# Altium PCB MCU_board_2024-08-19.pcbdoc
Units mil, origin at the board's own origin, x right, y up, seen from the top; angles counter-clockwise.
Board outline 1649.61 x 1629.92 mil, 2 copper layers (Top Layer, Bottom Layer); 11 components, 44 nets, 73 pads, 20 vias.
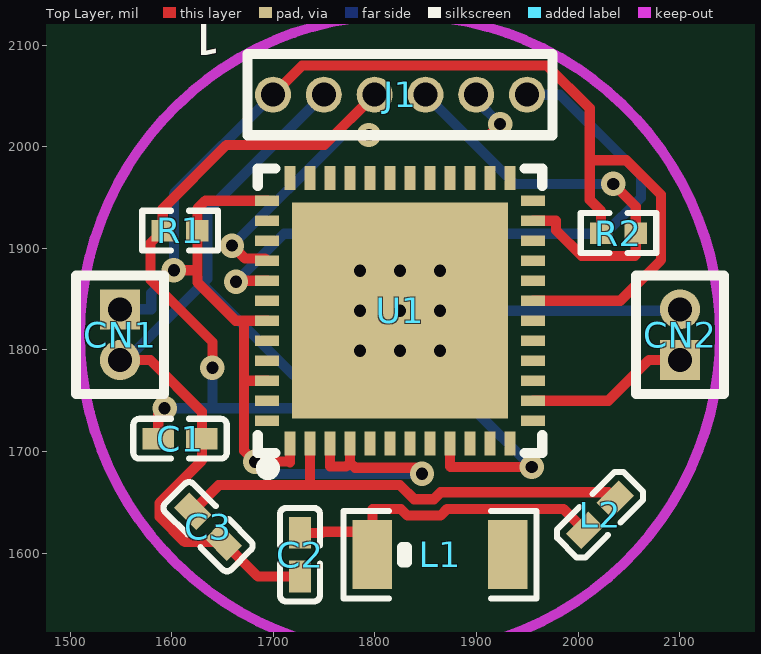
[diagram p0: Top Layer view]
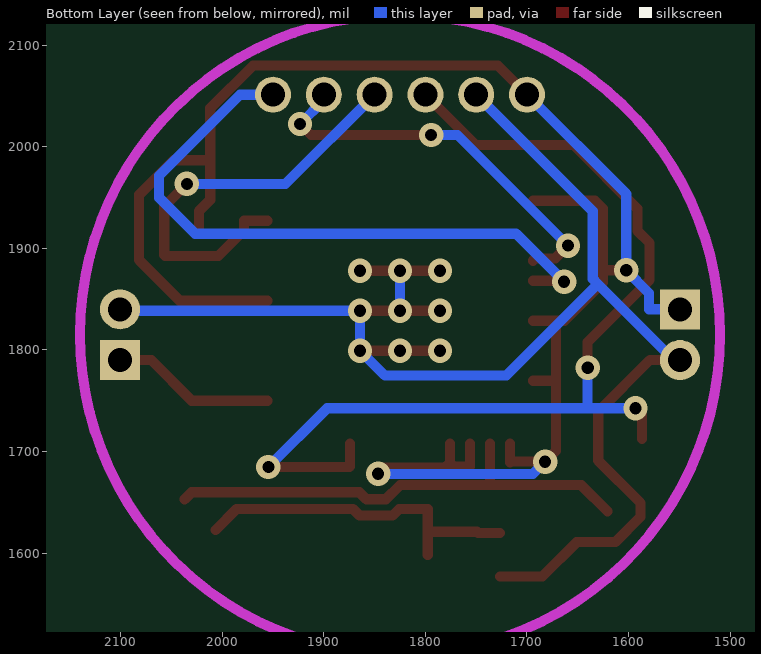
[diagram p1: Bottom Layer view, seen from below]

## Layer stack, top to bottom
Top Layer: signal copper (thickness not stored)
Dielectric: dielectric 12.6, FR-4, Dk 4.8
Bottom Layer: signal copper (thickness not stored)

## Board outline
2649.61,1000 1000,1000 1000,2629.92 2649.61,2629.92

## Components (designator, comment, footprint, x,y, rotation, side; value= is the part's Value field where it differs from the comment)
C1 "0.1uF" C0402 1608.27,1712.6 r0 top
C2 "2.7pF" C0402 1726.38,1598.42 r90 top
C3 "4.7pF" C0402 1635.83,1625.98 r135 top
CN1 "KH-1.27FH-1X2P-H4.3" HDR-TH_2P-P1.27-V-F 1549.21,1814.96 r270 top
CN2 "KH-1.27FH-1X2P-H4.3" HDR-TH_2P-P1.27-V-F 2100.39,1814.96 r90 top
J1 "HDR-M-2.54_1x6" CONN-TH_6P-P1.27_KINGHELM_KH-1.27FH-1X6P-H4.3 1824.8,2051.18 r0 top
L1 "ANT SMD L3.1 W1.6" ANT-SMD_L3.1-W1.6 1864.17,1598.42 r0 top
L2 "1.6nH" L0402 2021.65,1637.8 r45 top
R1 "10k" R0402 1608.27,1917.32 r0 top
R2 "10k" R0402 2039.8,1914.96 r0 top
U1 "ESP32-PICO-D4" LGA-48_L7.0-W7.0-P0.50-BL-EP5.4 1824.8,1838.58 r0 top

## Footprints (in the part's own frame and the unit in brackets; to place one, negate y for a bottom-side part, rotate by r counter-clockwise, add the part's x,y. Pads: shape width x height; smd on the part's side, far side on the other; paste and mask are expansions set on the pad)
ANT-SMD_L3.1-W1.6 [mil]
  rect 38.73x68.03 smd: 1(-66.61,0) 2(66.61,0)
  silkscreen extent -95,-43 95,43
C0402 [mm]
  rect 0.79x0.54 smd: 1(-0.545,0) 2(0.545,0)
  silkscreen extent -1.17,-0.5 1.17,0.5
CONN-TH_6P-P1.27_KINGHELM_KH-1.27FH-1X6P-H4.3 [mm]
  round 0.9 hole 0.6: 1(-3.175,0) 2(-1.905,0) 3(-0.635,0) 4(0.635,0) 5(1.905,0) 6(3.175,0)
  silkscreen extent -3.81,-1.02 3.81,1.02
HDR-TH_2P-P1.27-V-F [mm]
  rect 1x1 hole 0.6: 1(-0.635,0)
  round 1 hole 0.6: 2(0.635,0)
  silkscreen extent -1.48,-1.1 1.48,1.1
L0402 [mm]
  rect 0.79x0.54 smd: 1(-0.545,0) 2(0.545,0)
  silkscreen extent -1.17,-0.5 1.17,0.5
LGA-48_L7.0-W7.0-P0.50-BL-EP5.4 [mm]
  rect 0.27x0.6 smd: 1(-2.75,-3.32) 2(-2.25,-3.32) 3(-1.75,-3.32) 4(-1.25,-3.32) 5(-0.75,-3.32) 6(-0.25,-3.32) 7(0.25,-3.32) 8(0.75,-3.32) 9(1.25,-3.32) 10(1.75,-3.32) 11(2.25,-3.32) 12(2.75,-3.32) 25(2.75,3.32) 26(2.25,3.32) 27(1.75,3.32) 28(1.25,3.32) 29(0.75,3.32) 30(0.25,3.32) 31(-0.25,3.32) 32(-0.75,3.32) 33(-1.25,3.32) 34(-1.75,3.32) 35(-2.25,3.32) 36(-2.75,3.32)
  rect 0.6x0.27 smd: 13(3.32,-2.75) 14(3.32,-2.25) 15(3.32,-1.75) 16(3.32,-1.25) 17(3.32,-0.75) 18(3.32,-0.25) 19(3.32,0.25) 20(3.32,0.75) 21(3.32,1.25) 22(3.32,1.75) 23(3.32,2.25) 24(3.32,2.75) 37(-3.32,2.75) 38(-3.32,2.25) 39(-3.32,1.75) 40(-3.32,1.25) 41(-3.32,0.75) 42(-3.32,0.25) 43(-3.32,-0.25) 44(-3.32,-0.75) 45(-3.32,-1.25) 46(-3.32,-1.75) 47(-3.32,-2.25) 48(-3.32,-2.75)
  rect 5.4x5.4 smd: 49(0,0)
  silkscreen extent -3.56,-4.09 3.56,3.56
R0402 [mm]
  rect 0.566x0.54 smd: 1(-0.433,0) 2(0.433,0)
  silkscreen extent -0.94,-0.5 0.94,0.5

## Via types
v1: diameter 24.02, hole 12.01, Top Layer to Bottom Layer, tented both sides, 11 vias
v2: diameter 24.02, hole 12, Top Layer to Bottom Layer, tented both sides, 9 vias

## Nets (pads, with @x,y where several pads share a name; then routed paths per layer and width w, separated by ;. In a path a pad name is that pad's centre, name@x,y a point inside that pad or via, vN(x,y) a via of type N, cw(c..) or ccw(c..) an arc to the next point about the centre after c; other vN are vias at no path point)
EN: C1.1 J1.3 R1.1 U1.9 | length 1002.9
  Top Layer w10: C1.1 1586.81,1736.33 v1(1593.08,1742.6) ; v1(1640.14,1782.5) 1640.14,1807.74 1579.13,1868.75 1579.13,1905.23 R1.1 1591.22,1938.94 1653.9,2001.62 1750.24,2001.62 J1.3 ; U1.9 1874.01,1685.07 1874.39,1684.69 v1(1954.38,1684.69)
  Bottom Layer w10: v1(1593.08,1742.6) 1640.14,1742.6 ; v1(1640.14,1782.5) 1640.14,1742.6 ; v1(1954.38,1684.69) 1896.47,1742.6 1640.14,1742.6
GND: C1.2 C2.1 C3.1 CN1.2 CN2.2 J1.2 U1.49 | length 1565.8
  Top Layer w10: CN1.2 1578.88,1789.96 1629.72,1739.12 1629.72,1734.22 1629.72,1723.41 C1.2 1629.72,1690.98 1588.18,1649.44 1588.18,1635.62 1612.99,1610.81 C3.1 1684.84,1576.97 C2.1 ; v2(1785.43,1799.2) v2(1824.8,1799.2) v2(1864.17,1799.2) ; v2(1785.43,1838.58) v2(1824.8,1838.58) v2(1864.17,1838.58) ; v2(1785.44,1877.95) v2(1824.8,1877.95) v2(1864.18,1877.95)
  Bottom Layer w10: CN1.2 1555.29,1789.96 1630.19,1864.86 ; J1.2 1635.18,1936.56 1635.18,1869.85 1630.19,1864.86 ; v2(1824.8,1838.58) v2(1824.8,1877.95) ; CN2.2 2099.02,1838.58 v2(1864.17,1838.58) v2(1864.17,1799.2) 1839.72,1774.75 1720.29,1774.75 1630.19,1864.86
IO0: J1.4 R2.2 U1.23 | length 421.9
  Top Layer w10: U1.23 1978.31,1927.16 1978.31,1917.73 2003.49,1892.55 2056.05,1892.55 2056.84,1893.34 2056.84,1904.15 R2.2 2056.84,1941.1 v1(2034.6,1963.34)
  Bottom Layer w10: J1.4 1937.64,1963.34 v1(2034.6,1963.34)
L1_1: C2.2 L1.1 L2.1 | length 339.6
  Top Layer w10: C2.2 1748,1619.88 1749.05,1620.93 L1.1@1797.56,1620.93 ; L1.1 L1.1@1797.56,1620.93 ; L2.1 1985.6,1643.5 1871.2,1643.5 1864.58,1636.88 1832.17,1636.88 1825.62,1643.43 1797.56,1643.43 L1.1@1797.56,1620.93
PWM1: CN2.1 U1.14 | length 161.4
  Top Layer w10: U1.14 2029.76,1750 2069.72,1789.96 CN2.1
RX: J1.5 U1.40 | length 392.7
  Top Layer w10: v1(1659.45,1902.68) 1672.06,1890.07 1691.81,1890.07 U1.40 ; v1(1794.19,2011.51) 1912.44,2011.51 v1(1923.25,2022.32)
  Bottom Layer w10: v1(1659.45,1902.68) 1768.28,2011.51 v1(1794.19,2011.51) ; J1.5 1899.8,2045.77 v1(1923.25,2022.32)
TX: J1.6 U1.41 | length 630.9
  Top Layer w10: v1(1663.34,1867.01) 1670.19,1867.01 1671.29,1868.11 U1.41
  Bottom Layer w10: v1(1663.34,1867.01) 1710.56,1914.23 2026.35,1914.23 2061.9,1949.78 2061.9,1971.58 1982.3,2051.18 J1.6
U1_2: C3.2 L2.2 U1.2 | length 479.1
  Top Layer w10: C3.2 1646.4,1666.91 1734.84,1666.91 1736.22,1668.29 ; U1.2 1736.22,1685.07 1736.22,1668.29 ; L2.2 2029.85,1659.94 1864.93,1659.94 1857.92,1652.93 1838.82,1652.93 1824.84,1666.91 1737.6,1666.91 1736.22,1668.29
U1_5: U1.5
U1_6: U1.6
U1_7: U1.7
U1_8: U1.8
U1_10: U1.10
U1_11: U1.11
U1_12: U1.12
U1_13: U1.13
U1_15: U1.15
U1_16: U1.16
U1_17: U1.17
U1_18: U1.18
U1_20: U1.20
U1_21: U1.21
U1_22: U1.22
U1_24: U1.24
U1_25: U1.25
U1_26: U1.26
U1_27: U1.27
U1_28: U1.28
U1_29: U1.29
U1_30: U1.30
U1_31: U1.31
U1_32: U1.32
U1_33: U1.33
U1_34: U1.34
U1_35: U1.35
U1_36: U1.36
U1_38: U1.38
U1_39: U1.39
U1_42: U1.42
U1_44: U1.44
U1_45: U1.45
U1_47: U1.47
U1_48: U1.48
VDD: CN1.1 J1.1 R1.2 R2.1 U1.1 U1.3 U1.4 U1.19 U1.37 U1.43 U1.46 | length 1830.8
  Top Layer w10: v1(1602.19,1878.3) 1625.31,1878.3 ; U1.46 1671.29,1769.68 ; U1.43 1671.29,1828.74 ; U1.37@1694.09,1946.85 1633.22,1946.85 1625.31,1938.94 R1.2 1625.31,1878.3 ; J1.1 1728.58,2079.96 1969.33,2079.96 2011.54,2037.75 2011.54,1986.68 ; U1.1 1716.53,1689.04 1715.6,1689.97 v1(1682,1689.97) 1671.22,1700.75 1671.22,1769.61 1671.29,1769.68 ; U1.3 1755.9,1685.07 1771.62,1685.07 1775.59,1689.04 ; U1.4 1775.59,1689.04 ; v1(1846.37,1677.99) 1840.37,1683.99 1780.64,1683.99 1775.59,1689.04 ; U1.19 2041.64,1848.42 2081.58,1888.36 2081.58,1952.69 2047.59,1986.68 2011.54,1986.68 ; R2.1 2022.76,1936.58 2011.54,1947.8 2011.54,1986.68 ; 1625.31,1878.3 1625.31,1866.5 1663.07,1828.74 1671.29,1828.74 ; 1671.29,1769.68 1671.22,1769.75 1671.22,1828.67 1671.29,1828.74
  Bottom Layer w10: CN1.1 1579.89,1839.96 1579.89,1856 v1(1602.19,1878.3) 1602.19,1953.57 J1.1 ; v1(1682,1689.97) 1693.98,1677.99 v1(1846.37,1677.99)
pads on no net: L1.2

## Keep-outs
Keep-Out Layer:
  circle w10: c1824.8,1814.96 r314.96

## Text inside footprints (layer, text, board x,y; h text height)
J1: Top Overlay "1" at 1649.8,2129.64 h39.37 r180